# Altium PCB 74HC595.PcbDoc
Units mm, origin at the board's own origin, x right, y up, seen from the top; angles counter-clockwise.
Board outline 54.5 x 52 mm, 2 copper layers (Top Layer, Bottom Layer); 40 components, 39 nets, 135 pads, 90 vias.
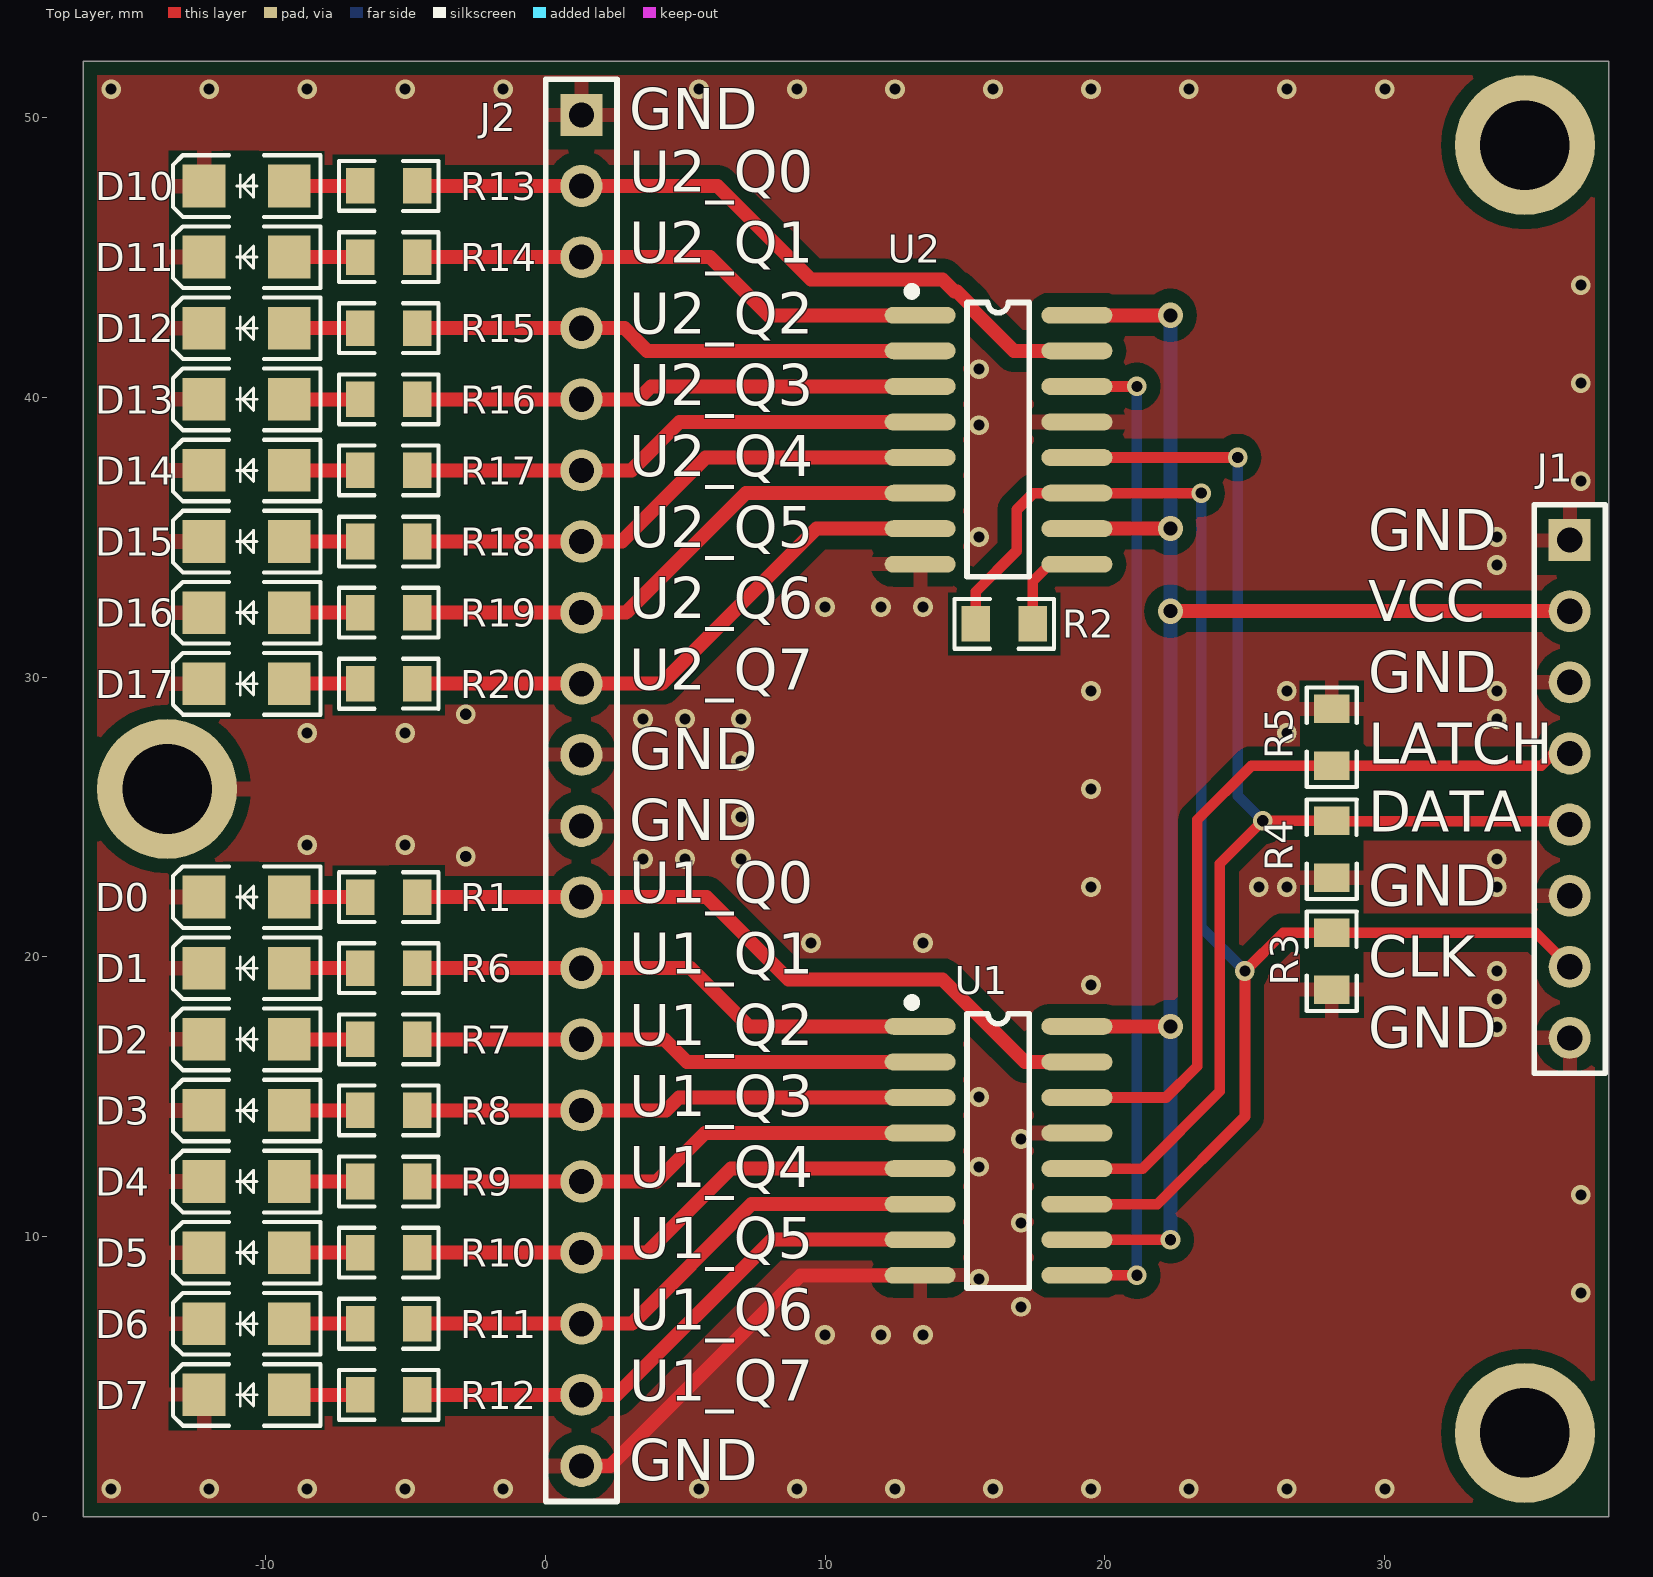
[diagram p0: Top Layer view]
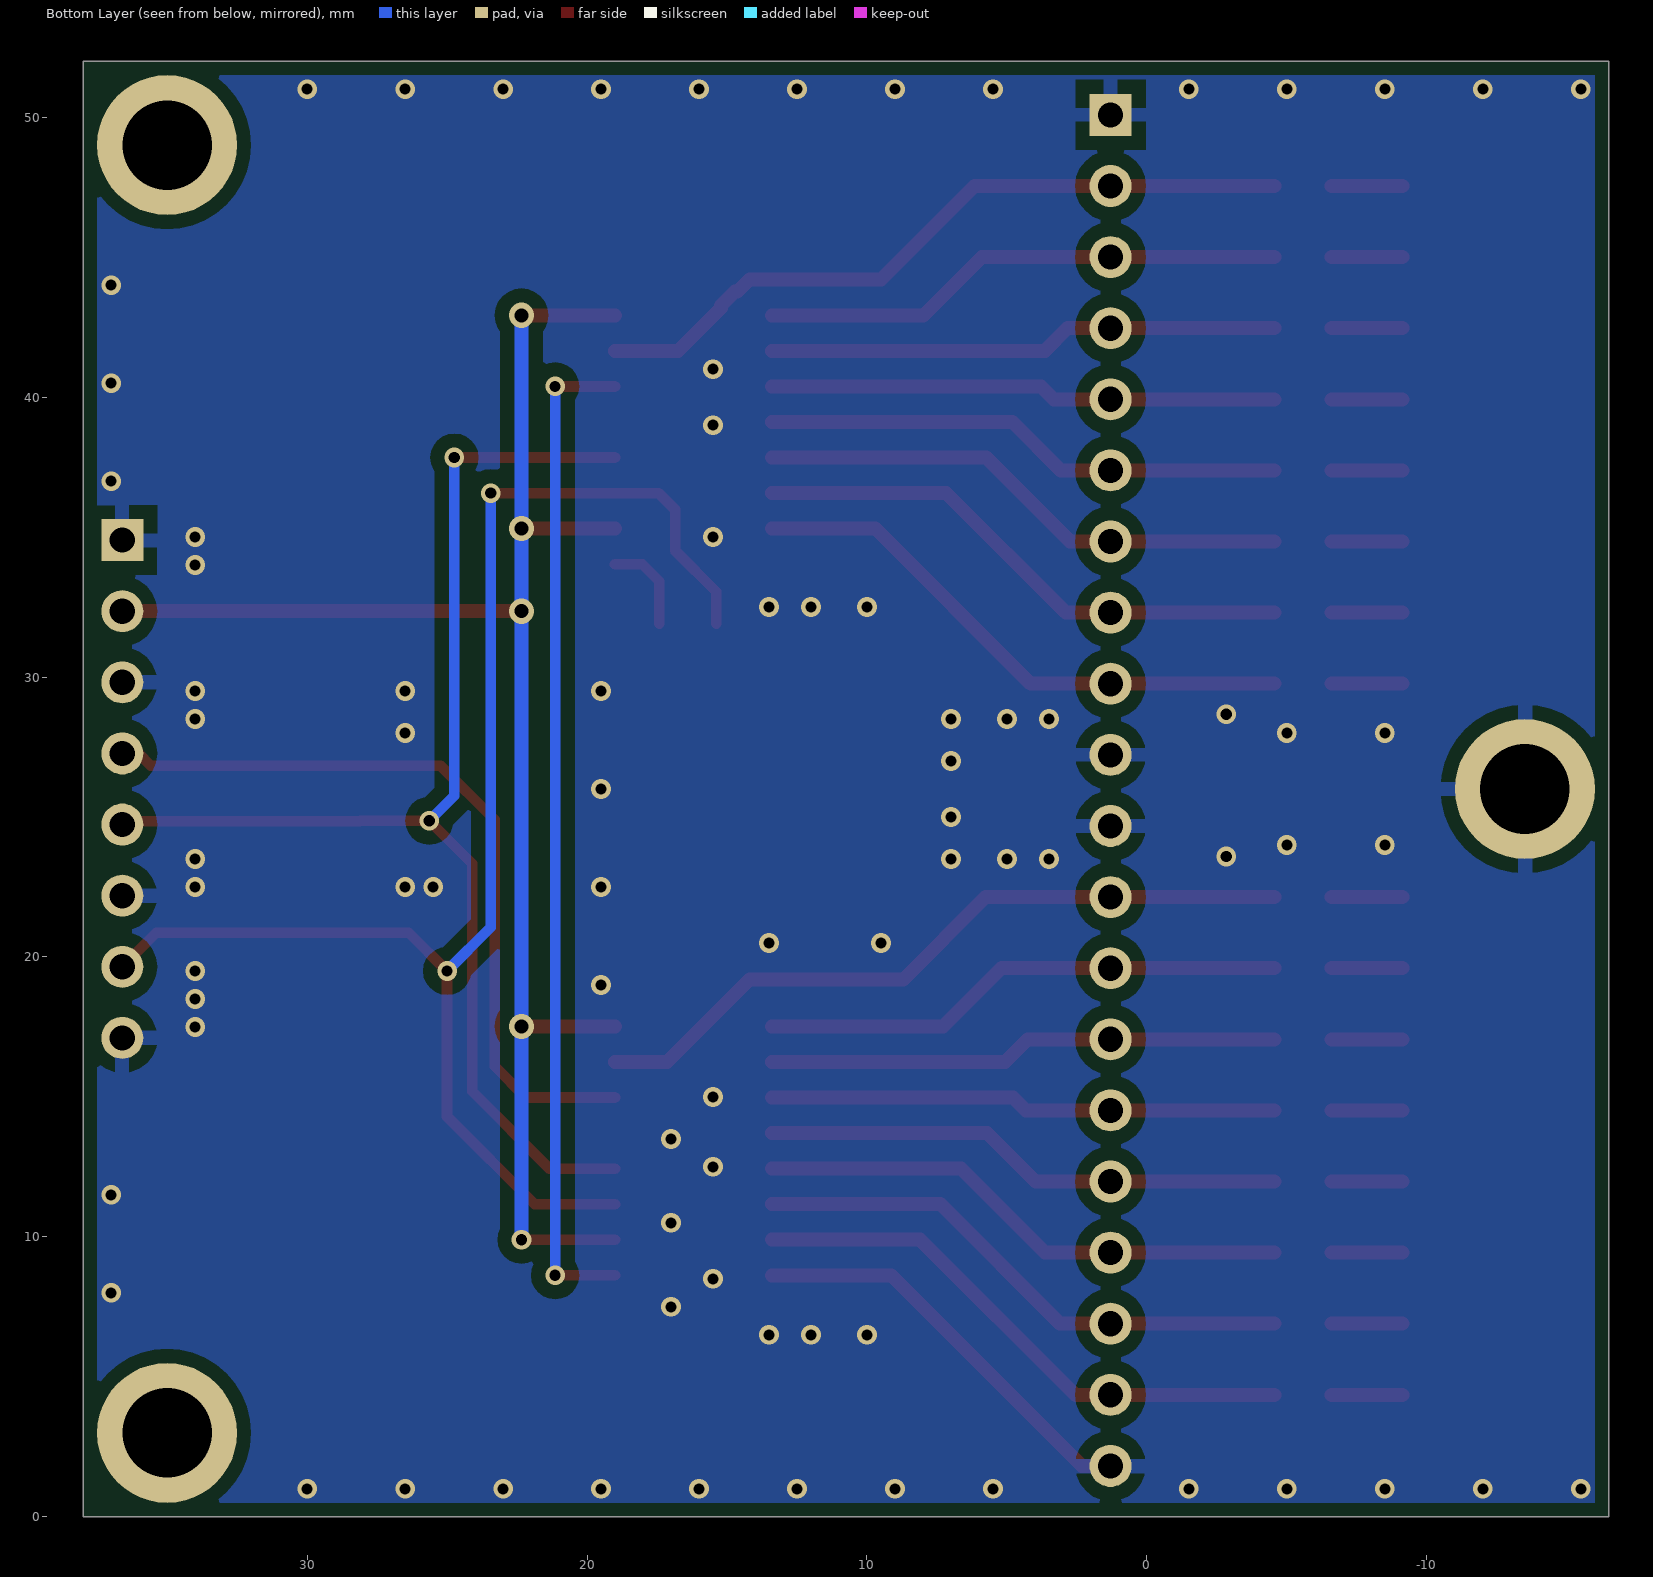
[diagram p1: Bottom Layer view, seen from below]
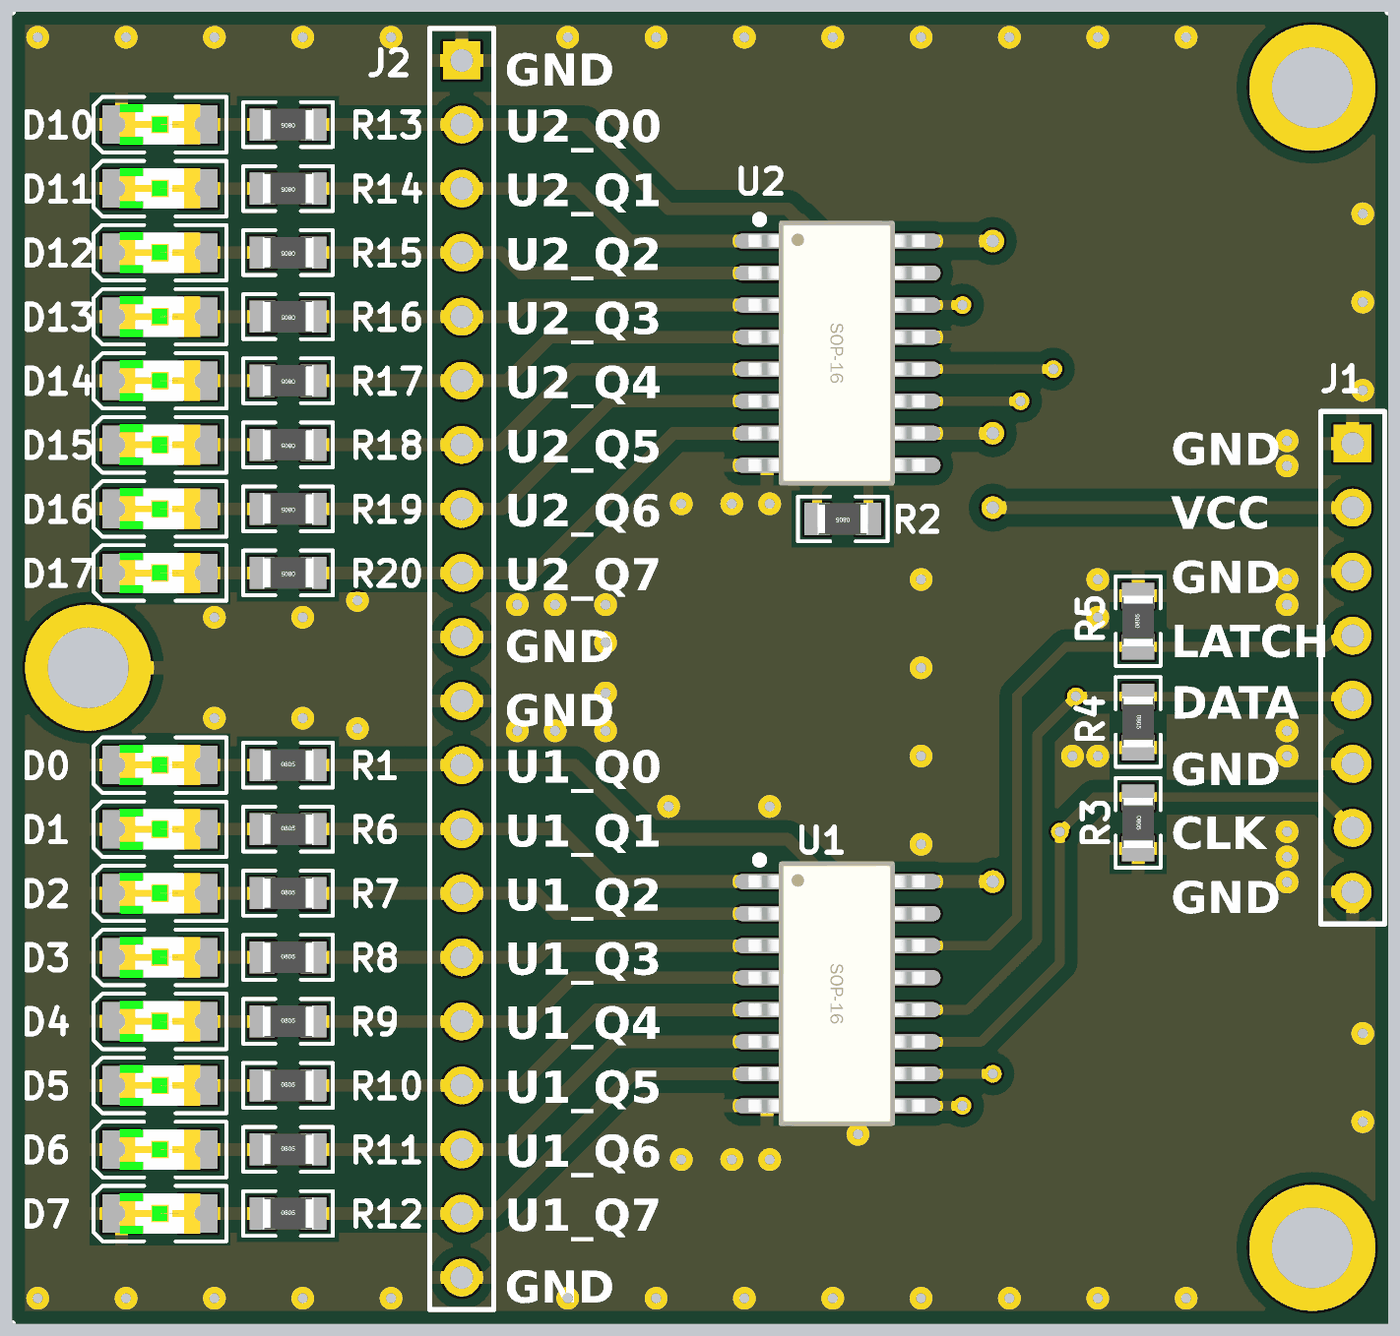
[diagram p2: 3D render of the assembled board from above, using the file's embedded part models]

## Layer stack, top to bottom
Top Solder: solder mask 0.0102, Solder Resist, Dk 3.5
Top Layer: signal copper 0.0356
Dielectric 1: dielectric 0.32, FR-4, Dk 4.8
Bottom Layer: signal copper 0.0356
Bottom Solder: solder mask 0.0102, Solder Resist, Dk 3.5

## Board outline
-16.5,0 -16.5,52 38,52 38,0

## Design rules (kind name [scope] priority, off if disabled: settings)
Clearance Clearance_1 [All vs InPolygon] p1: gap=0.5 ignorepadtopadclearanceinfootprint=FALSE except(0: Arc-Hole Track-Hole SMDPad-Hole THPad-Hole Via-Hole Fill-Hole Poly-Hole Region-Hole Text-Hole)
Clearance [All] p2: gap=0.3 ignorepadtopadclearanceinfootprint=FALSE
ComponentClearance [All] p1: gap=-5 collisioncheckmode=3 verticalgap=0.254 showdistances=FALSE
FabricationTestPointUsage TestPointUsage [All] p1: valid=0 allowmultiple=FALSE
FabricationTestpoint Testpoint [(IsPad And (OnTopLayer Or OnBottomLayer))] p1: side=3 testpointundercomponent=TRUE minsize=1.016 maxsize=2.54 preferedsize=1.524 minholesize=0 maxholesize=1.016 preferedholesize=0.813 testpointgrid=0.025 allowsidetop=TRUE allowsidebottom=TRUE usegrid=TRUE gridtolerance=0
HoleSize [All] p1: absolutevalues=TRUE maxlimit=10 minlimit=0.025 maxpercent=80.000 minpercent=20.000
HoleToHoleClearance [All] p1: gap=0 allowstackedmicrovias=TRUE
MinimumSolderMaskSliver [All] p1: minsoldermaskwidth=0
NetAntennae [All] p1 off: netantennaetolerance=0
PlaneConnect [All] p1: planeconnectstyle=Direct reliefexpansion=0.508 reliefentries=4 reliefconductorwidth=0.254 reliefairgap=0.254
PolygonConnect IsVia [All vs IsVia] p1: connectstyle=Direct reliefconductorwidth=0.508 reliefentries=4 polygonreliefangle="90 Angle" airgapwidth=0.254
PolygonConnect PolygonConnect_1 [All] p2: connectstyle=Relief reliefconductorwidth=0.508 reliefentries=4 polygonreliefangle="90 Angle" airgapwidth=0.5
RoutingVias [All] p1: holewidth=0.4 width=0.7 viastyle="Through Hole" minholewidth=0.3 minwidth=0.6 maxholewidth=1.2 maxwidth=2
SilkToSilkClearance [All] p1: silktosilkclearance=0
SilkToSolderMaskClearance [IsPad] p1: minsilkscreentomaskgap=0 clearancetoexposedcopper=TRUE
SolderMaskExpansion [All] p1: expansion=0.102 istentingtop=FALSE
Width [All] p1: maxlimit=10 minlimit=0.2 preferedwidth=0.6
20 further rules are at their usual default settings.

## Components (designator, comment, footprint, x,y, rotation, side; value= is the part's Value field where it differs from the comment)
D0 "LED0" 1206LED -10.66,22.14 r180 top
D1 "LED0" 1206LED -10.66,19.6 r180 top
D2 "LED0" 1206LED -10.66,17.06 r180 top
D3 "LED0" 1206LED -10.66,14.52 r180 top
D4 "LED0" 1206LED -10.66,11.98 r180 top
D5 "LED0" 1206LED -10.66,9.44 r180 top
D6 "LED0" 1206LED -10.66,6.9 r180 top
D7 "LED0" 1206LED -10.66,4.36 r180 top
D10 "LED0" 1206LED -10.66,47.54 r180 top
D11 "LED0" 1206LED -10.66,45 r180 top
D12 "LED0" 1206LED -10.66,42.46 r180 top
D13 "LED0" 1206LED -10.66,39.92 r180 top
D14 "LED0" 1206LED -10.66,37.38 r180 top
D15 "LED0" 1206LED -10.66,34.84 r180 top
D16 "LED0" 1206LED -10.66,32.3 r180 top
D17 "LED0" 1206LED -10.66,29.76 r180 top
J1 "Header8" 8P-2.54-H 36.6,34.89 r270 top
J2 "Header20" 20P-2.54-H 1.3,50.08 r270 top
R1 "680R" 0805R_M -5.58,22.14 r0 top
R2 "470R" 0805R_M 16.4,31.9 r180 top
R3 "1M" 0805R_M 28.1,19.85 r270 top
R4 "1M" 0805R_M 28.1,23.85 r270 top
R5 "1M" 0805R_M 28.1,27.85 r90 top
R6 "680R" 0805R_M -5.58,19.6 r0 top
R7 "680R" 0805R_M -5.58,17.06 r0 top
R8 "680R" 0805R_M -5.58,14.52 r0 top
R9 "680R" 0805R_M -5.58,11.98 r0 top
R10 "680R" 0805R_M -5.58,9.44 r0 top
R11 "680R" 0805R_M -5.58,6.9 r0 top
R12 "680R" 0805R_M -5.58,4.36 r0 top
R13 "680R" 0805R_M -5.58,47.54 r180 top
R14 "680R" 0805R_M -5.58,45 r180 top
R15 "680R" 0805R_M -5.58,42.46 r180 top
R16 "680R" 0805R_M -5.58,39.92 r180 top
R17 "680R" 0805R_M -5.58,37.38 r180 top
R18 "680R" 0805R_M -5.58,34.84 r180 top
R19 "680R" 0805R_M -5.58,32.3 r180 top
R20 "680R" 0805R_M -5.58,29.76 r180 top
U1 "74HC595" SOIC-16_150mil 16.2,13.075 r0 top
U2 "74HC595" SOIC-16_150mil 16.2,38.475 r0 top

## Footprints (in the part's own frame and the unit in brackets; to place one, negate y for a bottom-side part, rotate by r counter-clockwise, add the part's x,y. Pads: shape width x height; smd on the part's side, far side on the other; paste and mask are expansions set on the pad)
8P-2.54-H [mm] "Connector; Header; 8 Position"
  rect 1.5x1.5 hole 0.9: 1(0,0)
  round 1.5 hole 0.9: 2(2.54,0) 3(5.08,0) 4(7.62,0) 5(10.16,0) 6(12.7,0) 7(15.24,0) 8(17.78,0)
  silkscreen extent -1.27,-1.27 19.05,1.27
20P-2.54-H [mm] "Connector; Header; 20Position"
  rect 1.5x1.5 hole 0.9: 1(0,0)
  round 1.5 hole 0.9: 2(2.54,0) 3(5.08,0) 4(7.62,0) 5(10.16,0) 6(12.7,0) 7(15.24,0) 8(17.78,0) 9(20.32,0) 10(22.86,0) 11(25.4,0) 12(27.94,0) 13(30.48,0) 14(33.02,0) 15(35.56,0) 16(38.1,0) 17(40.64,0) 18(43.18,0) 19(45.72,0) 20(48.26,0)
  silkscreen extent -1.27,-1.27 49.53,1.27
0805R_M [mil] "Chip Resistor, Body 2.0x1.2mm, IPC Low Density"
  rect 40x50 smd: 1(-40,0) 2(40,0)
  silkscreen extent -70,-35 70,35, body extent -39,-25 39,25, height 20
1206LED [mil] "Chip Resistor, Body3.2x1.6mm, IPC Low Density"
  rect 60x60 smd: 1(-60,0) 2(60,0)
  silkscreen extent -104,-43 103,43, body extent -63,-32 63,32, height 36
SOIC-16_150mil [mm] "SOIC, 16-Leads, Body 9.9x3.8mm (max), Pitch 1.27mm"
  oval 2.54x0.6 smd: 1(-2.8,4.445) 2(-2.8,3.175) 3(-2.8,1.905) 4(-2.8,0.635) 5(-2.8,-0.635) 6(-2.8,-1.905) 7(-2.8,-3.175) 8(-2.8,-4.445) 9(2.8,-4.445) 10(2.8,-3.175) 11(2.8,-1.905) 12(2.8,-0.635) 13(2.8,0.635) 14(2.8,1.905) 15(2.8,3.175) 16(2.8,4.445)
  silkscreen extent -3.25,-4.9 1.1,5.45, body extent -3.54,-5.25 3.46,5.25, height 1.9

## Part data
D0 D1 D2 D3 D4 D5 D6 D7 D10 D11 D12 D13 D14 D15 D16 D17: "LED灯", LatestRevisionDate=08-Jul-2005, LatestRevisionNote="Mech Layer 1 removed.", PackageDescription="LED; 2 Leads", PackageReference=LED-0, Published=8-Jun-2000, Publisher="Altium Limited"
J1: "8PIN插座"
J2: "20PIN插座"
R1 R2 R3 R4 R5 R6 R7 R8 R9 R10 R11 R12 R13 R14 R15 R16 R17 R18 R19 R20: library part Res, "电阻", LatestRevisionDate=17-Jul-2002, LatestRevisionNote="Re-released for DXP Platform.", PackageDescription="Axial Device, Thru-Hole; 2 Leads; 0.4 in Pin Spacing", PackageReference=AXIAL-0.4, Published=8-Jun-2000, Publisher="Altium Limited"
U1 U2: library part 74LS595, "移位寄存器"

## Free pads (board coordinates)
  round 5 hole 3.2: 0(-13.5,26) 0(35,3) 0(35,49)

## Via types
v1: diameter 0.7, hole 0.4, Top Layer to Bottom Layer, 86 vias
v2: diameter 0.9, hole 0.5, Top Layer to Bottom Layer, 4 vias

## Nets (pads, with @x,y where several pads share a name; then routed paths per layer and width w, separated by ;. In a path a pad name is that pad's centre, name@x,y a point inside that pad or via, vN(x,y) a via of type N, cw(c..) or ccw(c..) an arc to the next point about the centre after c; other vN are vias at no path point)
GND: D0.2 D1.2 D2.2 D3.2 D4.2 D5.2 D6.2 D7.2 D10.2 D11.2 D12.2 D13.2 D14.2 D15.2 D16.2 D17.2 J1.1 J1.3 J1.6 J1.8 J2.1 J2.10 J2.11 J2.20 pad.0@-13.5,26 R3.2 R4.2 R5.2 U1.8 U1.13 U2.8 U2.13 | length 14.9
  Top Layer w0.5: J2.20 2.32,1.82 9.13,8.63 U1.8
  other v1: -15.5,1 -12,1 -8.5,1 -5,1 -1.5,1 5.5,1 9,1 12.5,1 16,1 19.5,1 23,1 26.5,1 30,1 10,6.5 12,6.5 13.5,6.5 17,7.5 37,8 15.5,8.5 17,10.5 37,11.5 15.5,12.5 17,13.5 15.5,15 34,17.5 34,18.5 19.5,19 34,19.5 9.5,20.5 13.5,20.5 19.5,22.5 25.5,22.5 26.5,22.5 34,22.5 3.5,23.5 5,23.5 7,23.5 34,23.5 -2.83,23.588 -8.5,24 -5,24 7,25 19.5,26 7,27 -8.5,28 -5,28 26.5,28 3.5,28.5 5,28.5 7,28.5 34,28.5 -2.83,28.668 19.5,29.5 26.5,29.5 34,29.5 10,32.5 12,32.5 13.5,32.5 34,34 15.5,35 34,35 37,37 15.5,39 37,40.5 15.5,41 37,44 -15.5,51 -12,51 -8.5,51 -5,51 -1.5,51 5.5,51 9,51 12.5,51 16,51 19.5,51 23,51 26.5,51 30,51
NetD0_1: D0.1 R1.1 | length 2.5
  Top Layer w0.5: D0.1 R1.1
NetD1_1: D1.1 R6.1 | length 2.5
  Top Layer w0.5: D1.1 R6.1
NetD2_1: D2.1 R7.1 | length 2.5
  Top Layer w0.5: D2.1 R7.1
NetD3_1: D3.1 R8.1 | length 2.5
  Top Layer w0.5: D3.1 R8.1
NetD4_1: D4.1 R9.1 | length 2.5
  Top Layer w0.5: D4.1 R9.1
NetD5_1: D5.1 R10.1 | length 2.5
  Top Layer w0.5: D5.1 R10.1
NetD6_1: D6.1 R11.1 | length 2.5
  Top Layer w0.5: D6.1 R11.1
NetD7_1: D7.1 R12.1 | length 2.5
  Top Layer w0.5: D7.1 R12.1
NetD10_1: D10.1 R13.2 | length 2.5
  Top Layer w0.5: D10.1 R13.2
NetD11_1: D11.1 R14.2 | length 2.5
  Top Layer w0.5: D11.1 R14.2
NetD12_1: D12.1 R15.2 | length 2.5
  Top Layer w0.5: D12.1 R15.2
NetD13_1: D13.1 R16.2 | length 5.1
  Top Layer w0.5: D13.1 R16.2 D13.1
NetD14_1: D14.1 R17.2 | length 2.5
  Top Layer w0.5: D14.1 R17.2
NetD15_1: D15.1 R18.2 | length 2.5
  Top Layer w0.5: D15.1 R18.2
NetD16_1: D16.1 R19.2 | length 2.5
  Top Layer w0.5: D16.1 R19.2
NetD17_1: D17.1 R20.2 | length 2.5
  Top Layer w0.5: D17.1 R20.2
NetJ1_4: J1.4 R5.1 U1.14 | length 27.8
  Top Layer w0.381: U1.14 22.18,14.98 23.3,16.1 23.3,24.9 25.234,26.834 R5.1 35.58,26.834 36.016,27.27 J1.4
NetJ1_5: J1.5 R4.1 U1.12 U2.12 | length 46.6
  Top Layer w0.381: U1.12 21.34,12.44 24.1,15.2 24.1,23.332 v1(25.634,24.866) R4.1 28.116,24.85 J1.5@36.6,24.85 ; U2.12 v1(24.74,37.84)
  Bottom Layer w0.381: v1(24.74,37.84) 24.74,25.76 v1(25.634,24.866)
NetJ1_7: J1.7 R2.2 R3.1 U1.11 U2.11 | length 54.4
  Top Layer w0.381: R2.2 15.384,33.042 16.843,34.501 16.843,35.969 17.444,36.57 U2.11 v1(23.44,36.57) ; U1.11 21.87,11.17 25,14.3 v1(25,19.5) 26.366,20.866 R3.1 35.384,20.866 J1.7
  Bottom Layer w0.381: v1(23.44,36.57) 23.44,21.06 v1(25,19.5)
NetR2_1: R2.1 U2.9 | length 3.4
  Top Layer w0.381: R2.1 17.416,33.416 18.03,34.03 U2.9
NetU1_9: U1.9 U2.14 | length 36
  Top Layer w0.381: U1.9 v1(21.14,8.63) ; U2.14 v1(21.14,40.38)
  Bottom Layer w0.381: v1(21.14,8.63) v1(21.14,40.38)
U1_Q0: J2.12 R1.2 U1.15 | length 26
  Top Layer w0.5: R1.2 J2.12 5.76,22.14 8.7,19.2 14.2,19.2 17.15,16.25 U1.15
U1_Q1: J2.13 R6.2 U1.1 | length 18.8
  Top Layer w0.5: R6.2 J2.13 5.2,19.6 7.28,17.52 U1.1
U1_Q2: J2.14 R7.2 U1.2 | length 18.3
  Top Layer w0.5: R7.2 J2.14 4.26,17.06 5.07,16.25 U1.2
U1_Q3: J2.15 R8.2 U1.3 | length 18.2
  Top Layer w0.5: R8.2 J2.15 4.32,14.52 4.78,14.98 U1.3
U1_Q4: J2.16 R9.2 U1.4 | length 18.7
  Top Layer w0.5: R9.2 J2.16 3.98,11.98 5.71,13.71 U1.4
U1_Q5: J2.17 R10.2 U1.5 | length 19.2
  Top Layer w0.5: R10.2 J2.17 3.64,9.44 6.64,12.44 U1.5
U1_Q6: J2.18 R11.2 U1.6 | length 19.7
  Top Layer w0.5: R11.2 J2.18 3.1,6.9 7.37,11.17 U1.6
U1_Q7: J2.19 R12.2 U1.7 | length 20.3
  Top Layer w0.5: R12.2 J2.19 2.56,4.36 8.1,9.9 U1.7
U2_Q0: J2.2 R13.1 U2.15 | length 26.1
  Top Layer w0.5: R13.1 J2.2 6.16,47.54 9.5,44.2 14.2,44.2 14.63,43.77 14.722,43.77 15.22,43.272 15.22,43.18 16.75,41.65 U2.15
U2_Q1: J2.3 R14.1 U2.1 | length 18.8
  Top Layer w0.5: R14.1 J2.3 5.9,45 7.98,42.92 U2.1
U2_Q2: J2.4 R15.1 U2.2 | length 18.3
  Top Layer w0.5: R15.1 J2.4 2.84,42.46 3.65,41.65 U2.2
U2_Q3: J2.5 R16.1 U2.3 | length 24
  Top Layer w0.5: U2.3 3.78,40.38 3.32,39.92 J2.5 ; J2.5 R16.1 J2.5
U2_Q4: J2.6 R17.1 U2.4 | length 18.7
  Top Layer w0.5: R17.1 J2.6 3.08,37.38 4.81,39.11 U2.4
U2_Q5: J2.7 R18.1 U2.5 | length 19.2
  Top Layer w0.5: R18.1 J2.7 2.74,34.84 5.74,37.84 U2.5
U2_Q6: J2.8 R19.1 U2.6 | length 19.7
  Top Layer w0.5: R19.1 J2.8 2.9,32.3 7.17,36.57 U2.6
U2_Q7: J2.9 R20.1 U2.7 | length 20.3
  Top Layer w0.5: R20.1 J2.9 4.16,29.76 9.7,35.3 U2.7
VCC: J1.2 U1.10 U1.16 U2.10 U2.16 | length 60.6
  Top Layer w0.381: U1.10 v1(22.34,9.9)
  Top Layer w0.5: U1.16 v2(22.34,17.52) ; U2.10 v2(22.34,35.3) ; U2.16 v2(22.34,42.92) ; v2(22.34,32.35) J1.2
  Bottom Layer w0.5: v1(22.34,9.9) v2@22.34,42.9

## Polygon pours and split planes (outlines as drawn)
GND on Top Layer "NONET_L-01_P-001" (solid, remove dead copper, pour order 0): 37.5,51.5 -16,51.5 -16,0.5 37.5,0.5
GND on Bottom Layer "NONET_L-01_P-001" (solid, remove dead copper, pour order 1): 37.5,51.5 -16,51.5 -16,0.5 37.5,0.5

## Other copper
Top Layer:
  pour cut-out: -11.509,23.413 -10.212,23.413 -10.035,23.236 -10.035,3.461 -10.398,3.098 -11.498,3.098 -11.5,3.1 -11.422,3.178 -11.422,17.425
  pour cut-out: -11.509,48.813 -10.212,48.813 -10.035,48.636 -10.035,28.861 -10.398,28.498 -11.498,28.498 -11.5,28.5 -11.422,28.578 -11.422,42.825

## Silkscreen, mask and mechanical layers (free items; w line width, h text height)
Top Overlay:
  text "GND" at 3,49.085 h2.5
  text "U2_Q0" at 3.002,46.85 h2.5
  text "U2_Q1" at 3.002,44.31 h2.5
  text "U2_Q2" at 3.002,41.77 h2.5
  text "U2_Q3" at 3.002,39.23 h2.5
  text "U2_Q4" at 3.002,36.69 h2.5
  text "U2_Q5" at 3.002,34.15 h2.5
  text "GND" at 29.4,34.048 h2.5
  text "U2_Q6" at 3.002,31.61 h2.5
  text "VCC" at 29.402,31.517 h2.5
  text "U2_Q7" at 3.002,29.07 h2.5
  text "GND" at 29.4,28.968 h2.5
  text "LATCH" at 29.402,26.423 h2.5
  text "GND" at 3,26.225 h2.5
  text "DATA" at 29.4,23.989 h2.5
  text "GND" at 3,23.685 h2.5
  text "U1_Q0" at 3.002,21.45 h2.5
  text "GND" at 29.4,21.348 h2.5
  text "U1_Q1" at 3.002,18.91 h2.5
  text "CLK" at 29.402,18.817 h2.5
  text "U1_Q2" at 3.002,16.37 h2.5
  text "GND" at 29.4,16.268 h2.5
  text "U1_Q3" at 3.002,13.83 h2.5
  text "U1_Q4" at 3.002,11.29 h2.5
  text "U1_Q5" at 3.002,8.75 h2.5
  text "U1_Q6" at 3.002,6.21 h2.5
  text "U1_Q7" at 3.002,3.67 h2.5
  text "GND" at 3,0.825 h2.5
Mechanical 1:
  the board outline again, w0.15

## Dimensions
-16.5,52 to -16.5,0 on Top Overlay
-16.5,52 to 38,52 on Top Overlay